# EAGLE board waterius-factory-2.0wago (EAGLE 9.0.0)
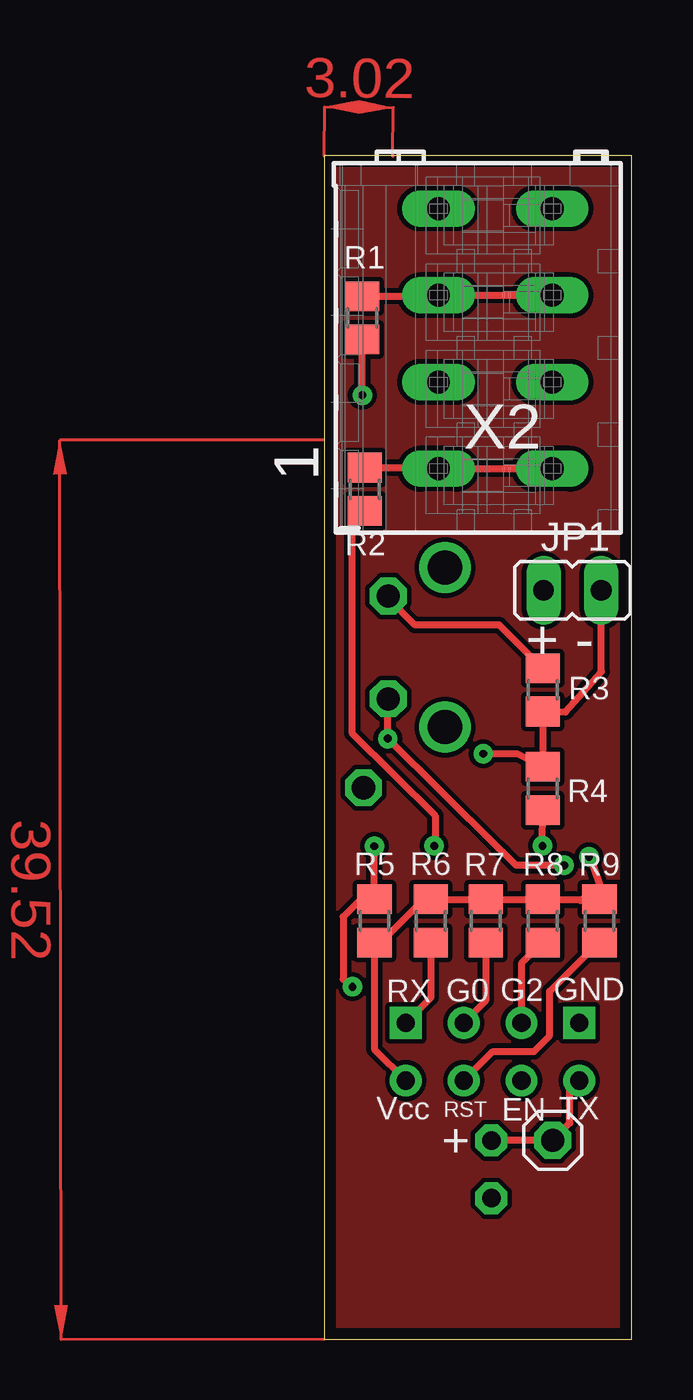
[diagram p0: board, top side]
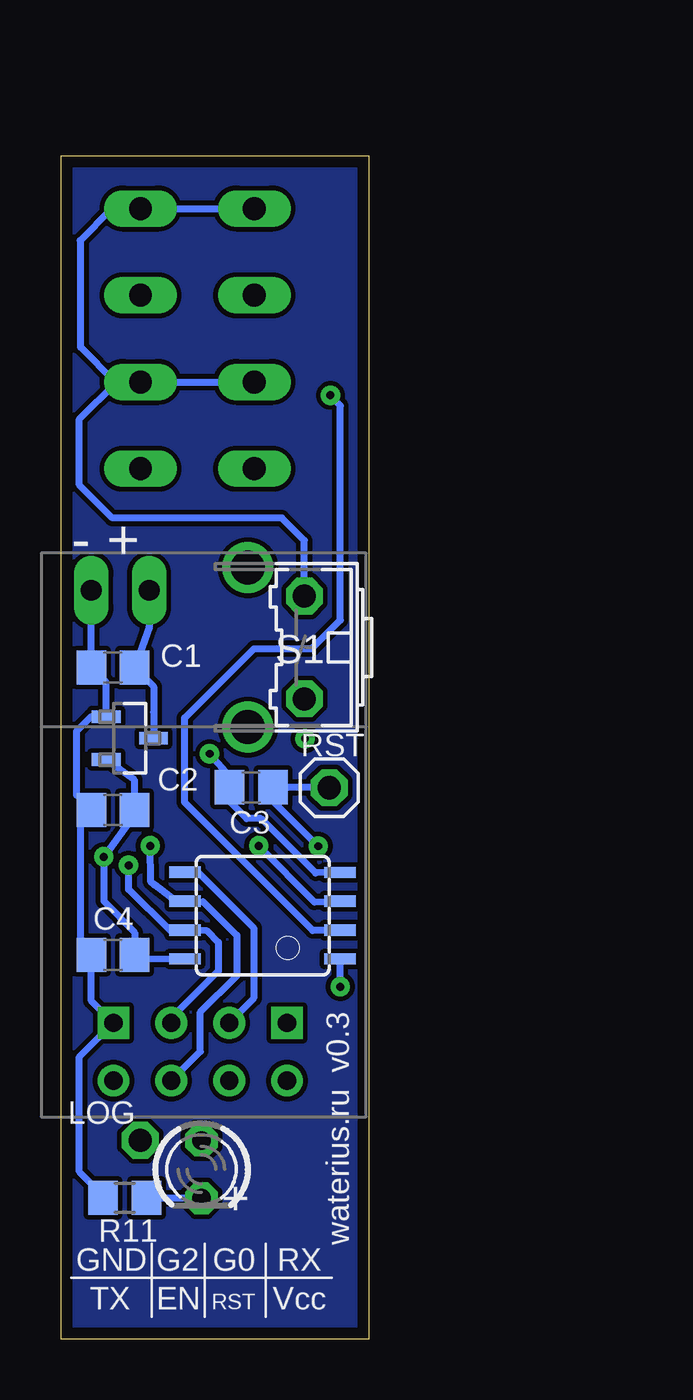
[diagram p1: board, bottom side, seen from below]

Size 13.5 x 52 mm. Coordinates in mm from the lower left corner, seen from the top.
Outline: 0,0 13.5,0 13.5,52 0,52 0,0
Copper layers (1*16): Top 0.035mm / dielectric 1.5mm / Bottom 0.035mm
Design rules "my *": minimum track width 0.25mm, minimum drill 0.3mm, track to track 0.2mm, track to pad 0.2mm, pad to pad 0.2mm, via to via 0.2mm, smd to smd 6mil, copper to edge 0.5mm, drill to drill 0.2mm, minimum pad ring 0.3mm, minimum via ring 0.25mm, stop-mask expansion 4mil, vias tented up to drill 0mil, thermal gap 10mil
Net classes: 0 default: clearance 0.205 mm

## Footprints (pad centres in the part's own frame; a part is rotated, then mirrored left to right if it is on the bottom)
C0805 = smd 1.3 x 1.5: 1 -0.95,0; 2 0.95,0
8S2 = smd 0.5 x 1.4: 1 -1.905,-3.404; 2 -0.645,-3.404; 3 0.625,-3.404; 4 1.895,-3.404; 5 1.905,3.404; 6 0.635,3.404; 7 -0.635,3.404; 8 -1.905,3.404
JP1 = drill 0.914 long: 1 0,-1.27; 2 0,1.27
LED3MM = drill 0.813 octagon: A -1.27,0; K 1.27,0
1X01 = drill 1.016 octagon: 1 0,0
R0805 = smd 1.3 x 1.5: 1 -0.95,0; 2 0.95,0
B3F-31XX = drill 1.016 octagon: 1 -2.261,-1.245; 2 2.261,-1.245 | drill 1.499 pad 2.159: 3 -3.505,1.245; 4 3.505,1.245
ESP01 = drill 0.8: CH_PD -1.285,-8.178; GPIO0 1.255,-5.638; GPIO2 -1.285,-5.638; RST 1.255,-8.178; TX -3.825,-8.178; VCC 3.795,-8.178 | drill 0.8 square: GND -3.825,-5.638; RX 3.795,-5.638
SOT95P237X112-3N = smd 0.559 x 1.27: 1 -0.94,-1.041; 2 0.94,-1.041; 3 0,1.041
P-235-104 = drill 1 long: L1.1 1.635,5.56; L1.2 -3.365,5.56; L2.1 1.635,1.75; L2.2 -3.365,1.75; L3.1 1.635,-2.06; L3.2 -3.365,-2.06; L4.1 1.635,-5.87; L4.2 -3.365,-5.87

## Placement (x,y rotation side)
C1  1uF  [C0805]  11.23,29.52 180 bottom
C2  0.1uF  [C0805]  11.23,23.27 180 bottom
C3  0.1uF  [C0805]  5.15,24.26 180 bottom
C4  1uF  [C0805]  11.23,16.89 180 bottom
IC1  TINY85-20SU  [8S2]  4.66,18.62 90 bottom
JP1  [JP1]  10.91,32.91 90 top
LED1  RED  [LED3MM]  7.34,7.47 270 bottom
LOG  [1X01]  10.03,8.75 0 top
R1  3k3  [R0805]  1.68,44.88 270 top
R2  3k3  [R0805]  1.79,37.35 270 top
R3  300  [R0805]  9.59,28.54 270 top
R4  3k3  [R0805]  9.59,24.21 270 top
R5  3k3  [R0805]  2.21,18.39 270 top
R6  3k3  [R0805]  4.68,18.39 90 top
R7  3k3  [R0805]  7.1,18.39 90 top
R8  3k3  [R0805]  9.59,18.39 90 top
R9  3k3  [R0805]  12.09,18.39 90 top
R11  300  [R0805]  10.71,6.21 0 bottom
RST  RST  [1X01]  1.73,24.24 0 bottom
S1  [B3F-31XX]  4.06,30.4 90 bottom
U3  ESP01  [ESP01]  7.38,19.55 0 bottom
U$1  MCP1700T-3002E/TT  [SOT95P237X112-3N]  10.49,26.42 270 bottom
X2  235-104  [P-235-104]  6.65,43.81 180 top

## Library data of the parts
C1-C4 = rcl; SPICEPREFIX: C
IC1 = atmel; MPN: ATTINY13-20SU; OC_FARNELL: 9171568; OC_NEWARK: 96K6522
JP1 = jumper
LED1 = led
LOG RST = pinhead
R1-R9 R11 = resistor
S1 = switch-omron; MPN: B3F-3100; OC_FARNELL: 959704; OC_NEWARK: 36M3582
U3 = esp8266modules
U$1 = MCP1700T-3002E_TT; AVAILABILITY: Unavailable; DESCRIPTION: MCP1700 Series 250 mA 3 V Fixed Output LDO Voltage Regulator - SOT-23; MF: Microchip; MP: MCP1700T-3002E/TT; PACKAGE: SOT-23 Microchip; PRICE: None
X2 = con-wago_235

## Nets
+3V: C2.1 C4.1 IC1.8 R5.2 R6.2 R7.2 R8.2 R9.2 U3.VCC U$1.2
GND: C1.2 C2.2 C3.2 C4.2 IC1.4 JP1.1 R3.2 R4.1 R11.1 U3.GND U$1.1
GND1: R3.1 S1.2 X2.L2.1 X2.L2.2 X2.L4.1 X2.L4.2
IN1: IC1.2 R1.2
IN2: IC1.3 R2.2
N$1: C1.1 JP1.2 U$1.3
N$2: R6.1 U3.RX
N$3: R9.1 U3.RST
N$4: C3.1 IC1.1 R5.1 RST.1
N$5: LED1.A LOG.1 U3.TX
N$6: LED1.K R11.2
N$7: R1.1 X2.L3.1 X2.L3.2
N$8: R2.1 X2.L1.1 X2.L1.2
SCK: IC1.7 R8.1 S1.1 U3.GPIO2
SDA: IC1.5 R7.1 U3.GPIO0
WAKE_UP: IC1.6 R4.2 U3.CH_PD

## Tracks (layer width: path | path; a pad name or v marks a point on that pad's centre or on a via)
+3V  (via drill 0.35)
  Top 0.305: R9.2 R7.2 R6.2 4.38,19.34 2.72,17.68 2.45,17.68 R5.2 2.21,12.74 U3.VCC | R9.2 11.27,19.27 R8.2 | R9.2 11.33,19.33 | v11.63,21.2 11.66,21.21 12.09,20.01 R9.2
  Bottom 0.305: U$1.2 10.3,24.6 C2.1 10.28,23.5 10.29,23.04 v11.63,21.2 11.63,19.25 10.28,17.87 C4.1 | IC1.8 9.93,16.69 C4.1 | 10.44,16.57 C4.1
GND  (via drill 0.35)
  Top 0.305: U3.GND | R4.1 8.47,25.73 v6.99,25.73 | R4.1 R3.2 10.59,27.56 12.19,29.34 12.18,29.35 JP1.1 | 9.58,25.46 R4.1
  Bottom 0.305: U3.GND | IC1.4 2.33,20.49 4.72,22.89 5.36,22.89 6.1,23.63 C3.2 6.1,24.72 v6.99,25.73 | 12.18,29.02 C1.2 | U3.GND 12.18,14.88 C4.2 12.68,17.38 12.68,23.76 C2.2 12.83,23.92 12.83,26.72 12.19,27.36 U$1.1 11.53,28.88 C1.2 | R11.1 11.66,6.33 12.7,7.37 12.7,12.41 U3.GND | C1.2 JP1.1
GND1
  Top 0.305: R3.1 7.68,31.39 3.99,31.39 2.82,32.56 S1.2
  Bottom 0.305: X2.L2.2 11.07,42.06 12.7,40.44 12.7,37.54 11.25,36.09 3.81,36.09 2.82,35.1 S1.2 | X2.L2.2 X2.L2.1 | X2.L2.2 11.13,42.06 12.65,43.59 12.65,48.26 12.68,48.28 11.28,49.69 X2.L4.2 X2.L4.1
IN1  (via drill 0.35)
  Top 0.305: v1.68,41.48 R1.2
  Bottom 0.305: IC1.2 1.17,17.96 2.46,17.96 8.08,23.6 8.08,27.3 5.03,30.35 2.49,30.35 1.25,31.6 1.25,41.02 v1.68,41.48
IN2  (via drill 0.35)
  Top 0.305: v4.83,21.68 4.88,21.74 4.88,23.01 1.25,26.62 1.25,35.86 R2.2
  Bottom 0.305: v4.83,21.68 2.38,19.22 IC1.3
N$1
  Bottom 0.305: JP1.2 9.64,31.3 C1.1 9.45,28.7 9.45,27.56 U$1.3
N$2
  Top 0.305: R6.1 4.68,15 U3.RX
N$3
  Top 0.305: U3.RST 7.41,12.65 9.22,12.65 9.91,13.34 9.91,15.29 12.05,17.43 R9.1
N$4  (via drill 0.35)
  Top 0.305: v2.21,21.67 R5.1 1.61,19.34 0.84,18.57 0.84,15.82 v1.25,15.49
  Bottom 0.305: 1.04,16.71 IC1.1 1.26,15.48 v1.25,15.49 | v2.21,21.67 4.2,23.66 C3.1 4.18,24.24 RST.1
N$5
  Top 0.305: U3.TX 10.79,10.96 10.79,9.51 LOG.1 7.38,8.73 LED1.A
N$6
  Bottom 0.305: LED1.K 9.61,6.19 R11.2
N$7
  Top 0.305: R1.1 4.97,45.83 X2.L3.1 X2.L3.2
N$8
  Top 0.305: R2.1 4.97,38.3 X2.L1.1 X2.L1.2
N$9
  pour Top: 0,0 13.5,0 13.5,52 0,52
N$11
  pour Bottom: 0,0 13.5,0 13.5,52 0,52
SCK  (via drill 0.35)
  Top 0.305: R8.1 8.67,16.51 U3.GPIO2 | v10.54,20.83 8.43,20.83 7.92,21.34 7.59,21.64 v2.79,26.39 2.79,28.12 S1.1
  Bottom 0.305: U3.GPIO2 8.67,14.12 6.6,16.18 6.6,17.45 7.11,17.96 IC1.7 8.71,17.96 10.54,19.76 v10.54,20.83
SDA
  Top 0.305: R7.1 7.1,14.88 U3.GPIO0
  Bottom 0.305: IC1.5 7.44,20.47 | 7.44,20.47 5.05,18.09 5.05,14.98 U3.GPIO0 | 7.44,20.47 8.13,20.52
WAKE_UP  (via drill 0.35)
  Top 0.305: v9.59,21.68 R4.2
  Bottom 0.305: U3.CH_PD 7.39,12.64 7.39,14.38 5.79,15.98 5.79,17.75 7.26,19.23 IC1.6 8.43,19.23 9.4,19.96 9.58,20.12 v9.59,21.68
(copper drawn outside any net)
  shapes: Top area x2

## Text on the board
tNames: + - | RX | G0 | G2 | GND | Vcc | RST | EN | TX | +
bNames: - + | v0.3 | waterius.ru | + | RX | G0 | G2 | GND | Vcc | RST | EN | TX